# Altium PCB PCB_CONTROL.PcbDoc (part 13 of 15)
Units mil, origin at the board's own origin, x right, y up, seen from the top; angles counter-clockwise.
Board outline 7360.03 x 4773.15 mil, 2 copper layers (Top Layer, Bottom Layer); 73 components, 135 nets, 396 pads, 106 vias.
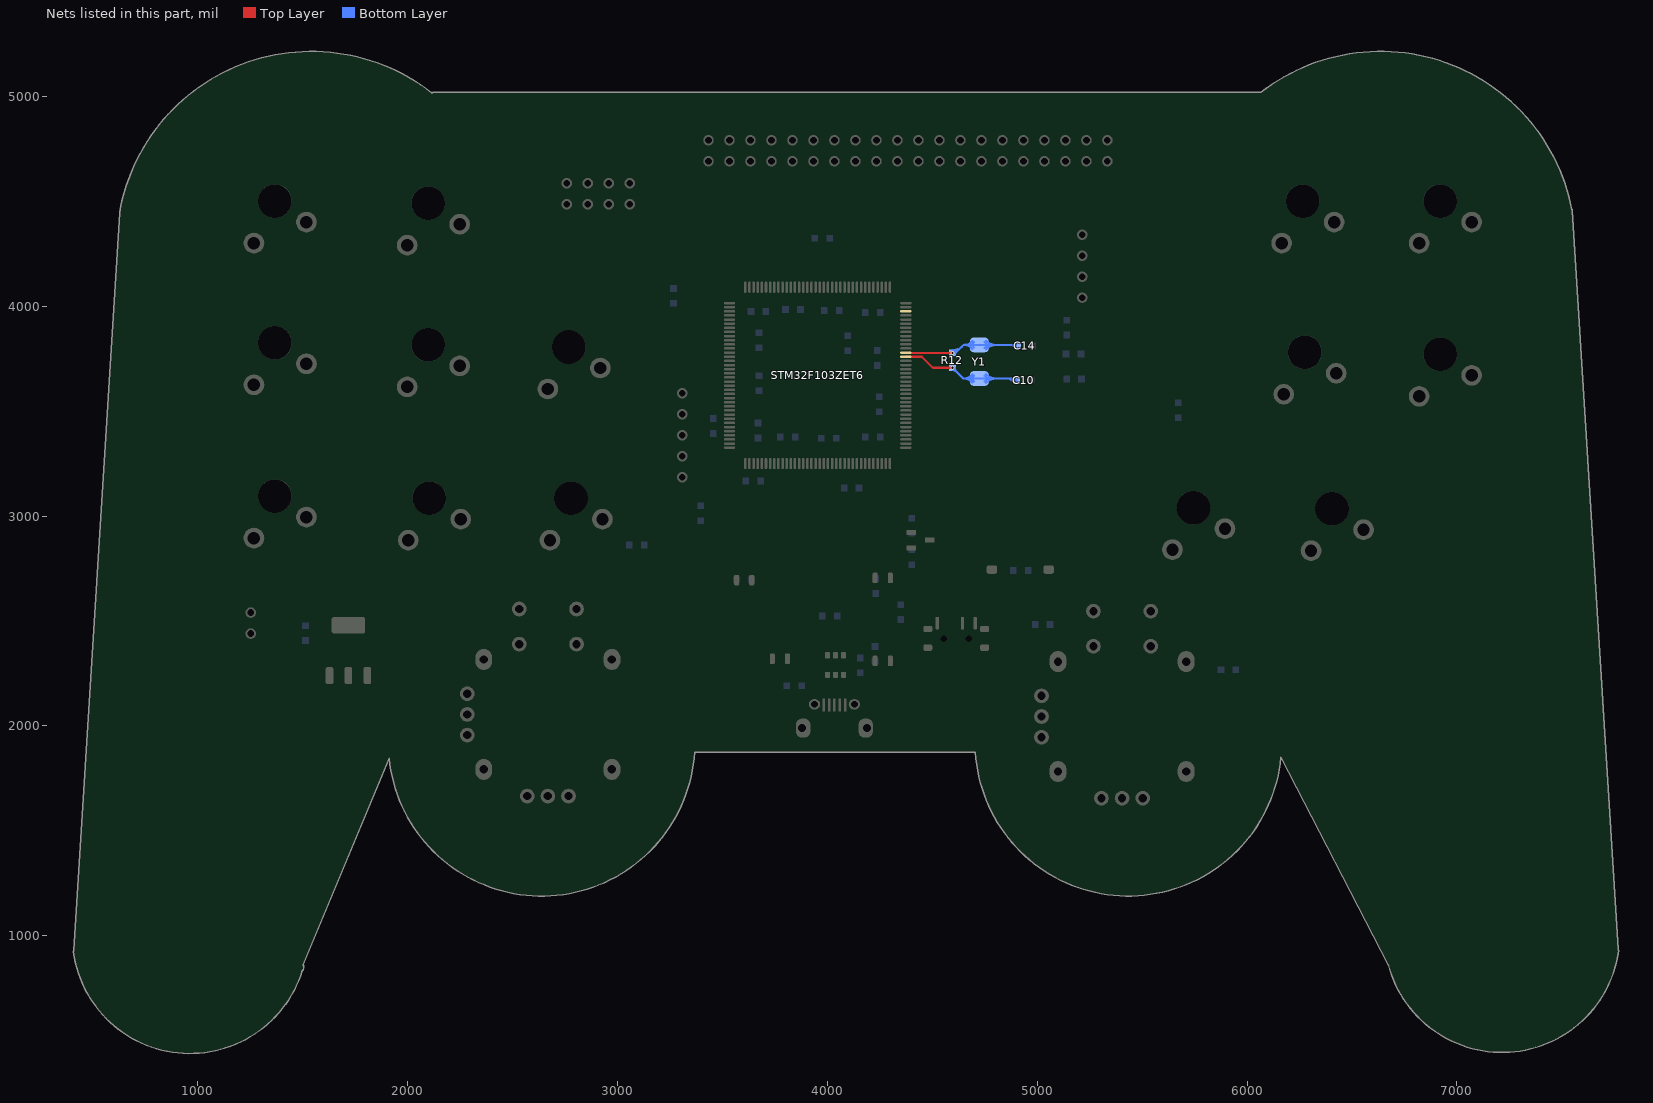
[diagram p13: the nets of this part, all layers, seen from the top]

## Via types
v1: diameter 20, hole 10, Top Layer to Bottom Layer, 104 vias
v2: diameter 30, hole 20, Top Layer to Bottom Layer, 2 vias

## Nets (pads, with @x,y where several pads share a name; then routed paths per layer and width w, separated by ;. In a path a pad name is that pad's centre, name@x,y a point inside that pad or via, vN(x,y) a via of type N, cw(c..) or ccw(c..) an arc to the next point about the centre after c; other vN are vias at no path point) (continued)
OSC_IN: C10.2 R12.2 STM32F103ZET6.23 Y1.2 | length 6551.4
  Top Layer w10: STM32F103ZET6.23@4375,3758.58 4451.42,3758.58 4504,3706 v1(4597,3706) ; STM32F103ZET6.23@4396,3758.58 4432,3758.58 ; STM32F103ZET6.23@4396,3758.58 4432,3758.58 ; STM32F103ZET6.23@4396,3758.58 4432,3758.58 ; 4557,3706 v1(4597,3706) ; 4557,3706 v1(4597,3706) ; 4557,3706 v1(4597,3706) ; 4584.93,3706 cw(c4584.93,3693.93) v1@4593.46,3702.46 ; 4584.93,3706 ccw(c4584.93,3718.07) v1@4593.46,3709.54 ; 4584.93,3706 cw(c4584.93,3693.93) v1@4593.46,3702.46 ; 4584.93,3706 ccw(c4584.93,3718.07) v1@4593.46,3709.54 ; 4584.93,3706 cw(c4584.93,3693.93) v1@4593.46,3702.46 ; 4584.93,3706 ccw(c4584.93,3718.07) v1@4593.46,3709.54 ; 4584.93,3706 cw(c4584.93,3693.93) v1@4593.46,3702.46 ; 4584.93,3706 ccw(c4584.93,3718.07) v1@4593.46,3709.54 ; 4584.93,3706 ccw(c4584.93,3718.07) v1@4593.46,3709.54 ; 4584.93,3706 cw(c4584.93,3693.93) v1@4593.46,3702.46 ; 4584.93,3706 ccw(c4584.93,3718.07) v1@4593.46,3709.54 ; 4584.93,3706 cw(c4584.93,3693.93) v1@4593.46,3702.46 ; 4584.93,3706 ccw(c4584.93,3718.07) v1@4593.46,3709.54 ; 4584.93,3706 cw(c4584.93,3693.93) v1@4593.46,3702.46 ; 4584.93,3706 ccw(c4584.93,3718.07) v1@4593.46,3709.54 ; 4584.93,3706 cw(c4584.93,3693.93) v1@4593.46,3702.46 ; 4584.93,3706 ccw(c4584.93,3718.07) v1@4593.46,3709.54 ; 4584.93,3706 cw(c4584.93,3693.93) v1@4593.46,3702.46 ; 4584.93,3706 ccw(c4584.93,3718.07) v1@4593.46,3709.54 ; 4584.93,3706 cw(c4584.93,3693.93) v1@4593.46,3702.46 ; 4584.93,3706 ccw(c4584.93,3718.07) v1@4593.46,3709.54 ; 4584.93,3706 cw(c4584.93,3693.93) v1@4593.46,3702.46 ; 4584.93,3706 ccw(c4584.93,3718.07) v1@4593.46,3709.54 ; 4584.93,3706 cw(c4584.93,3693.93) v1@4593.46,3702.46 ; 4584.93,3706 ccw(c4584.93,3718.07) v1@4593.46,3709.54 ; 4584.93,3706 cw(c4584.93,3693.93) v1@4593.46,3702.46 ; 4584.93,3706 ccw(c4584.93,3718.07) v1@4593.46,3709.54 ; 4584.93,3706 cw(c4584.93,3693.93) v1@4593.46,3702.46 ; 4584.93,3706 ccw(c4584.93,3718.07) v1@4593.46,3709.54 ; 4584.93,3706 cw(c4584.93,3693.93) v1@4593.46,3702.46 ; 4584.93,3706 ccw(c4584.93,3718.07) v1@4593.46,3709.54 ; 4584.93,3706 cw(c4584.93,3693.93) v1@4593.46,3702.46 ; 4584.93,3706 ccw(c4584.93,3718.07) v1@4593.46,3709.54 ; 4584.93,3706 cw(c4584.93,3693.93) v1@4593.46,3702.46 ; 4584.93,3706 ccw(c4584.93,3718.07) v1@4593.46,3709.54 ; 4584.93,3706 cw(c4584.93,3693.93) v1@4593.46,3702.46 ; 4584.93,3706 ccw(c4584.93,3718.07) v1@4593.46,3709.54 ; 4584.93,3706 cw(c4584.93,3693.93) v1@4593.46,3702.46 ; 4584.93,3706 ccw(c4584.93,3718.07) v1@4593.46,3709.54 ; 4584.93,3706 cw(c4584.93,3693.93) v1@4593.46,3702.46 ; 4584.93,3706 ccw(c4584.93,3718.07) v1@4593.46,3709.54 ; 4584.93,3706 cw(c4584.93,3693.93) v1@4593.46,3702.46 ; 4584.93,3706 ccw(c4584.93,3718.07) v1@4593.46,3709.54 ; 4584.93,3706 cw(c4584.93,3693.93) v1@4593.46,3702.46 ; 4584.93,3706 ccw(c4584.93,3718.07) v1@4593.46,3709.54 ; 4584.93,3706 cw(c4584.93,3693.93) v1@4593.46,3702.46 ; 4584.93,3706 ccw(c4584.93,3718.07) v1@4593.46,3709.54 ; 4584.93,3706 cw(c4584.93,3693.93) v1@4593.46,3702.46 ; 4584.93,3706 ccw(c4584.93,3718.07) v1@4593.46,3709.54 ; 4584.93,3706 cw(c4584.93,3693.93) v1@4593.46,3702.46 ; 4584.93,3706 ccw(c4584.93,3718.07) v1@4593.46,3709.54 ; 4584.93,3706 cw(c4584.93,3693.93) v1@4593.46,3702.46 ; 4584.93,3706 ccw(c4584.93,3718.07) v1@4593.46,3709.54 ; 4584.93,3706 cw(c4584.93,3693.93) v1@4593.46,3702.46 ; 4584.93,3706 ccw(c4584.93,3718.07) v1@4593.46,3709.54 ; 4584.93,3706 cw(c4584.93,3693.93) v1@4593.46,3702.46 ; 4584.93,3706 ccw(c4584.93,3718.07) v1@4593.46,3709.54 ; 4584.93,3706 cw(c4584.93,3693.93) v1@4593.46,3702.46 ; 4584.93,3706 ccw(c4584.93,3718.07) v1@4593.46,3709.54 ; 4584.93,3706 cw(c4584.93,3693.93) v1@4593.46,3702.46 ; 4584.93,3706 ccw(c4584.93,3718.07) v1@4593.46,3709.54 ; 4584.93,3706 cw(c4584.93,3693.93) v1@4593.46,3702.46 ; 4584.93,3706 ccw(c4584.93,3718.07) v1@4593.46,3709.54 ; 4584.93,3706 cw(c4584.93,3693.93) v1@4593.46,3702.46 ; 4584.93,3706 ccw(c4584.93,3718.07) v1@4593.46,3709.54 ; 4584.93,3706 cw(c4584.93,3693.93) v1@4593.46,3702.46 ; 4584.93,3706 ccw(c4584.93,3718.07) v1@4593.46,3709.54 ; 4584.93,3706 cw(c4584.93,3693.93) v1@4593.46,3702.46 ; 4584.93,3706 ccw(c4584.93,3718.07) v1@4593.46,3709.54 ; 4584.93,3706 cw(c4584.93,3693.93) v1@4593.46,3702.46 ; 4584.93,3706 ccw(c4584.93,3718.07) v1@4593.46,3709.54 ; 4584.93,3706 cw(c4584.93,3693.93) v1@4593.46,3702.46
  Bottom Layer w10: v1(4597,3706) 4648,3655 ; C10.2@4893,3655 Y1.2@4725,3655 4648,3655 ; R12.2@4597,3695 cw(c4597,3668.44) 4615.78,3687.22 ; R12.2@4597,3695 cw(c4597,3668.44) 4615.78,3687.22 ; R12.2@4597,3695 cw(c4597,3668.44) 4615.78,3687.22 ; R12.2@4597,3695 cw(c4597,3668.44) 4615.78,3687.22 ; R12.2@4597,3695 cw(c4597,3668.44) 4615.78,3687.22 ; R12.2@4597,3695 cw(c4597,3668.44) 4615.78,3687.22 ; R12.2@4597,3695 cw(c4597,3668.44) 4615.78,3687.22 ; R12.2@4597,3695 cw(c4597,3668.44) 4615.78,3687.22 ; R12.2@4597,3701 cw(c4597,3688.93) R12.2@4605.54,3697.46 ; R12.2@4597,3701 cw(c4597,3688.93) R12.2@4605.54,3697.46 ; R12.2@4597,3701 cw(c4597,3688.93) R12.2@4605.54,3697.46 ; R12.2@4597,3701 cw(c4597,3688.93) R12.2@4605.54,3697.46 ; R12.2@4597,3701 cw(c4597,3688.93) R12.2@4605.54,3697.46 ; R12.2@4597,3701 cw(c4597,3688.93) R12.2@4605.54,3697.46 ; R12.2@4597,3701 cw(c4597,3688.93) R12.2@4605.54,3697.46 ; R12.2@4597,3701 cw(c4597,3688.93) R12.2@4605.54,3697.46 ; R12.2@4597,3701 cw(c4597,3688.93) R12.2@4605.54,3697.46 ; R12.2@4597,3701 cw(c4597,3688.93) R12.2@4605.54,3697.46 ; R12.2@4602,3706 ccw(c4614.07,3706) R12.2@4605.54,3697.46 ; R12.2@4602,3706 ccw(c4614.07,3706) R12.2@4605.54,3697.46 ; R12.2@4602,3706 ccw(c4614.07,3706) R12.2@4605.54,3697.46 ; R12.2@4602,3706 ccw(c4614.07,3706) R12.2@4605.54,3697.46 ; R12.2@4602,3706 ccw(c4614.07,3706) R12.2@4605.54,3697.46 ; R12.2@4602,3706 ccw(c4614.07,3706) R12.2@4605.54,3697.46 ; R12.2@4602,3706 ccw(c4614.07,3706) R12.2@4605.54,3697.46 ; R12.2@4602,3706 ccw(c4614.07,3706) R12.2@4605.54,3697.46 ; R12.2@4602,3706 ccw(c4614.07,3706) R12.2@4605.54,3697.46 ; R12.2@4602,3706 ccw(c4614.07,3706) R12.2@4605.54,3697.46 ; R12.2@4608,3706 ccw(c4634.56,3706) 4615.78,3687.22 ; R12.2@4608,3706 ccw(c4634.56,3706) 4615.78,3687.22 ; R12.2@4608,3706 ccw(c4634.56,3706) 4615.78,3687.22 ; R12.2@4608,3706 ccw(c4634.56,3706) 4615.78,3687.22 ; R12.2@4608,3706 ccw(c4634.56,3706) 4615.78,3687.22 ; R12.2@4608,3706 ccw(c4634.56,3706) 4615.78,3687.22 ; R12.2@4608,3706 ccw(c4634.56,3706) 4615.78,3687.22 ; R12.2@4608,3706 ccw(c4634.56,3706) 4615.78,3687.22 ; 4648,3655 cw(c4648,3595.19) Y1.2@4692.62,3635.02 ; 4648,3655 ccw(c4648,3714.81) Y1.2@4692.62,3674.98 ; 4648,3655 ccw(c4648,3714.81) Y1.2@4692.62,3674.98 ; 4648,3655 cw(c4648,3595.19) Y1.2@4692.62,3635.02 ; 4648,3655 ccw(c4648,3714.81) Y1.2@4692.62,3674.98 ; 4648,3655 cw(c4648,3595.19) Y1.2@4692.62,3635.02 ; 4648,3655 ccw(c4648,3714.81) Y1.2@4692.62,3674.98 ; 4648,3655 cw(c4648,3595.19) Y1.2@4692.62,3635.02 ; 4648,3655 ccw(c4648,3714.81) Y1.2@4692.62,3674.98 ; 4648,3655 cw(c4648,3595.19) Y1.2@4692.62,3635.02 ; 4648,3655 ccw(c4648,3714.81) Y1.2@4692.62,3674.98 ; 4648,3655 cw(c4648,3595.19) Y1.2@4692.62,3635.02 ; 4648,3655 ccw(c4648,3714.81) Y1.2@4692.62,3674.98 ; 4648,3655 cw(c4648,3595.19) Y1.2@4692.62,3635.02 ; 4648,3655 ccw(c4648,3714.81) Y1.2@4692.62,3674.98 ; 4648,3655 cw(c4648,3595.19) Y1.2@4692.62,3635.02 ; 4670.34,3655 cw(c4670.34,3615.13) Y1.2@4700.08,3641.68 ; 4670.34,3655 ccw(c4670.34,3694.87) Y1.2@4700.08,3668.32 ; 4670.34,3655 ccw(c4670.34,3694.87) Y1.2@4700.08,3668.32 ; 4670.34,3655 cw(c4670.34,3615.13) Y1.2@4700.08,3641.68 ; 4670.34,3655 ccw(c4670.34,3694.87) Y1.2@4700.08,3668.32 ; 4670.34,3655 cw(c4670.34,3615.13) Y1.2@4700.08,3641.68 ; 4670.34,3655 ccw(c4670.34,3694.87) Y1.2@4700.08,3668.32 ; 4670.34,3655 cw(c4670.34,3615.13) Y1.2@4700.08,3641.68 ; 4670.34,3655 ccw(c4670.34,3694.87) Y1.2@4700.08,3668.32 ; 4670.34,3655 cw(c4670.34,3615.13) Y1.2@4700.08,3641.68 ; 4670.34,3655 ccw(c4670.34,3694.87) Y1.2@4700.08,3668.32 ; 4670.34,3655 cw(c4670.34,3615.13) Y1.2@4700.08,3641.68 ; 4670.34,3655 ccw(c4670.34,3694.87) Y1.2@4700.08,3668.32 ; 4670.34,3655 cw(c4670.34,3615.13) Y1.2@4700.08,3641.68 ; 4670.34,3655 ccw(c4670.34,3694.87) Y1.2@4700.08,3668.32 ; 4670.34,3655 cw(c4670.34,3615.13) Y1.2@4700.08,3641.68 ; Y1.2@4749.14,3640.86 cw(c4783.28,3606.72) 4783.28,3655 ; Y1.2@4749.14,3640.86 cw(c4783.28,3606.72) 4783.28,3655 ; Y1.2@4749.14,3640.86 cw(c4783.28,3606.72) 4783.28,3655 ; Y1.2@4749.14,3640.86 cw(c4783.28,3606.72) 4783.28,3655 ; Y1.2@4749.14,3640.86 cw(c4783.28,3606.72) 4783.28,3655 ; Y1.2@4749.14,3640.86 cw(c4783.28,3606.72) 4783.28,3655 ; Y1.2@4749.14,3640.86 cw(c4783.28,3606.72) 4783.28,3655 ; Y1.2@4749.14,3640.86 cw(c4783.28,3606.72) 4783.28,3655 ; Y1.2@4749.14,3669.14 ccw(c4783.28,3703.28) 4783.28,3655 ; Y1.2@4749.14,3669.14 ccw(c4783.28,3703.28) 4783.28,3655 ; Y1.2@4749.14,3669.14 ccw(c4783.28,3703.28) 4783.28,3655 ; Y1.2@4749.14,3669.14 ccw(c4783.28,3703.28) 4783.28,3655 ; Y1.2@4749.14,3669.14 ccw(c4783.28,3703.28) 4783.28,3655 ; Y1.2@4749.14,3669.14 ccw(c4783.28,3703.28) 4783.28,3655 ; Y1.2@4749.14,3669.14 ccw(c4783.28,3703.28) 4783.28,3655 ; Y1.2@4749.14,3669.14 ccw(c4783.28,3703.28) 4783.28,3655 ; Y1.2@4756.21,3633.79 cw(c4807.43,3582.57) 4807.43,3655 ; Y1.2@4756.21,3633.79 cw(c4807.43,3582.57) 4807.43,3655 ; Y1.2@4756.21,3633.79 cw(c4807.43,3582.57) 4807.43,3655 ; Y1.2@4756.21,3633.79 cw(c4807.43,3582.57) 4807.43,3655 ; Y1.2@4756.21,3633.79 cw(c4807.43,3582.57) 4807.43,3655 ; Y1.2@4756.21,3633.79 cw(c4807.43,3582.57) 4807.43,3655 ; Y1.2@4756.21,3633.79 cw(c4807.43,3582.57) 4807.43,3655 ; Y1.2@4756.21,3633.79 cw(c4807.43,3582.57) 4807.43,3655 ; Y1.2@4756.21,3676.21 ccw(c4807.43,3727.43) 4807.43,3655 ; Y1.2@4756.21,3676.21 ccw(c4807.43,3727.43) 4807.43,3655 ; Y1.2@4756.21,3676.21 ccw(c4807.43,3727.43) 4807.43,3655 ; Y1.2@4756.21,3676.21 ccw(c4807.43,3727.43) 4807.43,3655 ; Y1.2@4756.21,3676.21 ccw(c4807.43,3727.43) 4807.43,3655 ; Y1.2@4756.21,3676.21 ccw(c4807.43,3727.43) 4807.43,3655 ; Y1.2@4756.21,3676.21 ccw(c4807.43,3727.43) 4807.43,3655 ; Y1.2@4756.21,3676.21 ccw(c4807.43,3727.43) 4807.43,3655 ; 4853.72,3655 cw(c4853.72,3597.72) C10.2@4894.22,3638.22 ; 4853.72,3655 cw(c4853.72,3597.72) C10.2@4894.22,3638.22 ; 4853.72,3655 cw(c4853.72,3597.72) C10.2@4894.22,3638.22 ; 4853.72,3655 cw(c4853.72,3597.72) C10.2@4894.22,3638.22 ; 4853.72,3655 cw(c4853.72,3597.72) C10.2@4894.22,3638.22 ; 4853.72,3655 cw(c4853.72,3597.72) C10.2@4894.22,3638.22 ; 4853.72,3655 cw(c4853.72,3597.72) C10.2@4894.22,3638.22 ; 4853.72,3655 cw(c4853.72,3597.72) C10.2@4894.22,3638.22 ; 4873.86,3649.98 ccw(c4881.8,3663.74) C10.2@4893.73,3653.26 ; 4873.86,3649.98 ccw(c4881.8,3663.74) C10.2@4893.73,3653.26 ; 4873.86,3649.98 ccw(c4881.8,3663.74) C10.2@4893.73,3653.26 ; 4873.86,3649.98 ccw(c4881.8,3663.74) C10.2@4893.73,3653.26 ; 4873.86,3649.98 ccw(c4881.8,3663.74) C10.2@4893.73,3653.26 ; 4873.86,3649.98 ccw(c4881.8,3663.74) C10.2@4893.73,3653.26 ; 4873.86,3649.98 ccw(c4881.8,3663.74) C10.2@4893.73,3653.26 ; 4873.86,3649.98 ccw(c4881.8,3663.74) C10.2@4893.73,3653.26 ; 4873.86,3649.98 ccw(c4881.8,3663.74) C10.2@4893.73,3653.26 ; 4873.86,3649.98 ccw(c4881.8,3663.74) C10.2@4893.73,3653.26 ; 4873.86,3649.98 ccw(c4881.8,3663.74) C10.2@4893.73,3653.26 ; 4873.86,3649.98 ccw(c4881.8,3663.74) C10.2@4893.73,3653.26 ; 4873.86,3649.98 ccw(c4881.8,3663.74) C10.2@4893.73,3653.26 ; 4873.86,3649.98 ccw(c4881.8,3663.74) C10.2@4893.73,3653.26 ; 4873.86,3649.98 ccw(c4881.8,3663.74) C10.2@4893.73,3653.26 ; 4873.86,3649.98 ccw(c4881.8,3663.74) C10.2@4893.73,3653.26 ; 4873.86,3649.98 ccw(c4881.8,3663.74) C10.2@4893.73,3653.26 ; 4873.86,3649.98 ccw(c4881.8,3663.74) C10.2@4893.73,3653.26 ; 4873.86,3649.98 ccw(c4881.8,3663.74) C10.2@4893.73,3653.26 ; 4873.86,3649.98 ccw(c4881.8,3663.74) C10.2@4893.73,3653.26 ; 4873.86,3649.98 ccw(c4881.8,3663.74) C10.2@4893.73,3653.26 ; 4873.86,3649.98 ccw(c4881.8,3663.74) C10.2@4893.73,3653.26 ; 4873.86,3649.98 ccw(c4881.8,3663.74) C10.2@4893.73,3653.26 ; 4873.86,3649.98 ccw(c4881.8,3663.74) C10.2@4893.73,3653.26 ; 4873.86,3649.98 ccw(c4881.8,3663.74) C10.2@4893.73,3653.26 ; 4873.86,3649.98 ccw(c4881.8,3663.74) C10.2@4893.73,3653.26 ; 4873.86,3649.98 ccw(c4881.8,3663.74) C10.2@4893.73,3653.26 ; 4873.86,3649.98 ccw(c4881.8,3663.74) C10.2@4893.73,3653.26 ; 4877.86,3655 cw(c4877.86,3621.86) C10.2@4901.29,3645.29 ; 4877.86,3655 cw(c4877.86,3621.86) C10.2@4901.29,3645.29 ; 4877.86,3655 cw(c4877.86,3621.86) C10.2@4901.29,3645.29 ; 4877.86,3655 cw(c4877.86,3621.86) C10.2@4901.29,3645.29 ; 4877.86,3655 cw(c4877.86,3621.86) C10.2@4901.29,3645.29 ; 4877.86,3655 cw(c4877.86,3621.86) C10.2@4901.29,3645.29 ; 4877.86,3655 cw(c4877.86,3621.86) C10.2@4901.29,3645.29 ; 4877.86,3655 cw(c4877.86,3621.86) C10.2@4901.29,3645.29 ; 4884.41,3643.88 ccw(c4891.14,3655.53) C10.2@4901.25,3646.66 ; 4884.41,3643.88 ccw(c4891.14,3655.53) C10.2@4901.25,3646.66 ; 4884.41,3643.88 ccw(c4891.14,3655.53) C10.2@4901.25,3646.66 ; 4884.41,3643.88 ccw(c4891.14,3655.53) C10.2@4901.25,3646.66 ; 4884.41,3643.88 ccw(c4891.14,3655.53) C10.2@4901.25,3646.66 ; 4884.41,3643.88 ccw(c4891.14,3655.53) C10.2@4901.25,3646.66 ; 4884.41,3643.88 ccw(c4891.14,3655.53) C10.2@4901.25,3646.66 ; 4884.41,3643.88 ccw(c4891.14,3655.53) C10.2@4901.25,3646.66 ; 4884.41,3643.88 ccw(c4891.14,3655.53) C10.2@4901.25,3646.66 ; 4884.41,3643.88 ccw(c4891.14,3655.53) C10.2@4901.25,3646.66 ; 4884.41,3643.88 ccw(c4891.14,3655.53) C10.2@4901.25,3646.66 ; 4884.41,3643.88 ccw(c4891.14,3655.53) C10.2@4901.25,3646.66 ; 4884.41,3643.88 ccw(c4891.14,3655.53) C10.2@4901.25,3646.66 ; 4884.41,3643.88 ccw(c4891.14,3655.53) C10.2@4901.25,3646.66 ; 4884.41,3643.88 ccw(c4891.14,3655.53) C10.2@4901.25,3646.66 ; 4884.41,3643.88 ccw(c4891.14,3655.53) C10.2@4901.25,3646.66 ; 4884.41,3643.88 ccw(c4891.14,3655.53) C10.2@4901.25,3646.66 ; 4884.41,3643.88 ccw(c4891.14,3655.53) C10.2@4901.25,3646.66 ; 4884.41,3643.88 ccw(c4891.14,3655.53) C10.2@4901.25,3646.66 ; 4884.41,3643.88 ccw(c4891.14,3655.53) C10.2@4901.25,3646.66 ; 4884.41,3643.88 ccw(c4891.14,3655.53) C10.2@4901.25,3646.66 ; 4884.41,3643.88 ccw(c4891.14,3655.53) C10.2@4901.25,3646.66 ; 4884.41,3643.88 ccw(c4891.14,3655.53) C10.2@4901.25,3646.66 ; 4884.41,3643.88 ccw(c4891.14,3655.53) C10.2@4901.25,3646.66 ; 4884.41,3643.88 ccw(c4891.14,3655.53) C10.2@4901.25,3646.66 ; 4884.41,3643.88 ccw(c4891.14,3655.53) C10.2@4901.25,3646.66 ; 4884.41,3643.88 ccw(c4891.14,3655.53) C10.2@4901.25,3646.66 ; 4884.41,3643.88 ccw(c4891.14,3655.53) C10.2@4901.25,3646.66
OSC_OUT: C14.2 R12.1 STM32F103ZET6.24 Y1.1 | length 10818.7
  Top Layer w10: STM32F103ZET6.24@4376.27,3777 v1(4597,3777) ; STM32F103ZET6.24@4396,3778.27 4432.02,3777 ; STM32F103ZET6.24@4396,3778.27 4432.01,3777 ; STM32F103ZET6.24@4396,3778.27 4432.02,3777 ; 4557,3777 v1(4597,3777) ; 4557,3777 v1(4597,3777) ; 4557,3777 v1(4597,3777) ; 4584.93,3777 cw(c4584.93,3764.93) v1@4593.46,3773.46 ; 4584.93,3777 ccw(c4584.93,3789.07) v1@4593.46,3780.54 ; 4584.93,3777 cw(c4584.93,3764.93) v1@4593.46,3773.46 ; 4584.93,3777 ccw(c4584.93,3789.07) v1@4593.46,3780.54 ; 4584.93,3777 cw(c4584.93,3764.93) v1@4593.46,3773.46 ; 4584.93,3777 ccw(c4584.93,3789.07) v1@4593.46,3780.54 ; 4584.93,3777 cw(c4584.93,3764.93) v1@4593.46,3773.46 ; 4584.93,3777 ccw(c4584.93,3789.07) v1@4593.46,3780.54 ; 4584.93,3777 ccw(c4584.93,3789.07) v1@4593.46,3780.54 ; 4584.93,3777 cw(c4584.93,3764.93) v1@4593.46,3773.46 ; 4584.93,3777 ccw(c4584.93,3789.07) v1@4593.46,3780.54 ; 4584.93,3777 cw(c4584.93,3764.93) v1@4593.46,3773.46 ; 4584.93,3777 ccw(c4584.93,3789.07) v1@4593.46,3780.54 ; 4584.93,3777 cw(c4584.93,3764.93) v1@4593.46,3773.46 ; 4584.93,3777 ccw(c4584.93,3789.07) v1@4593.46,3780.54 ; 4584.93,3777 cw(c4584.93,3764.93) v1@4593.46,3773.46 ; 4584.93,3777 ccw(c4584.93,3789.07) v1@4593.46,3780.54 ; 4584.93,3777 cw(c4584.93,3764.93) v1@4593.46,3773.46 ; 4584.93,3777 ccw(c4584.93,3789.07) v1@4593.46,3780.54 ; 4584.93,3777 cw(c4584.93,3764.93) v1@4593.46,3773.46 ; 4584.93,3777 ccw(c4584.93,3789.07) v1@4593.46,3780.54 ; 4584.93,3777 cw(c4584.93,3764.93) v1@4593.46,3773.46 ; 4584.93,3777 ccw(c4584.93,3789.07) v1@4593.46,3780.54 ; 4584.93,3777 cw(c4584.93,3764.93) v1@4593.46,3773.46 ; 4584.93,3777 ccw(c4584.93,3789.07) v1@4593.46,3780.54 ; 4584.93,3777 cw(c4584.93,3764.93) v1@4593.46,3773.46 ; 4584.93,3777 ccw(c4584.93,3789.07) v1@4593.46,3780.54 ; 4584.93,3777 cw(c4584.93,3764.93) v1@4593.46,3773.46 ; 4584.93,3777 ccw(c4584.93,3789.07) v1@4593.46,3780.54 ; 4584.93,3777 cw(c4584.93,3764.93) v1@4593.46,3773.46 ; 4584.93,3777 ccw(c4584.93,3789.07) v1@4593.46,3780.54 ; 4584.93,3777 cw(c4584.93,3764.93) v1@4593.46,3773.46 ; 4584.93,3777 ccw(c4584.93,3789.07) v1@4593.46,3780.54 ; 4584.93,3777 cw(c4584.93,3764.93) v1@4593.46,3773.46 ; 4584.93,3777 ccw(c4584.93,3789.07) v1@4593.46,3780.54 ; 4584.93,3777 cw(c4584.93,3764.93) v1@4593.46,3773.46 ; 4584.93,3777 ccw(c4584.93,3789.07) v1@4593.46,3780.54 ; 4584.93,3777 cw(c4584.93,3764.93) v1@4593.46,3773.46 ; 4584.93,3777 ccw(c4584.93,3789.07) v1@4593.46,3780.54 ; 4584.93,3777 cw(c4584.93,3764.93) v1@4593.46,3773.46 ; 4584.93,3777 ccw(c4584.93,3789.07) v1@4593.46,3780.54 ; 4584.93,3777 cw(c4584.93,3764.93) v1@4593.46,3773.46 ; 4584.93,3777 ccw(c4584.93,3789.07) v1@4593.46,3780.54 ; 4584.93,3777 cw(c4584.93,3764.93) v1@4593.46,3773.46 ; 4584.93,3777 ccw(c4584.93,3789.07) v1@4593.46,3780.54 ; 4584.93,3777 cw(c4584.93,3764.93) v1@4593.46,3773.46 ; 4584.93,3777 ccw(c4584.93,3789.07) v1@4593.46,3780.54 ; 4584.93,3777 cw(c4584.93,3764.93) v1@4593.46,3773.46 ; 4584.93,3777 ccw(c4584.93,3789.07) v1@4593.46,3780.54 ; 4584.93,3777 cw(c4584.93,3764.93) v1@4593.46,3773.46 ; 4584.93,3777 ccw(c4584.93,3789.07) v1@4593.46,3780.54 ; 4584.93,3777 cw(c4584.93,3764.93) v1@4593.46,3773.46 ; 4584.93,3777 ccw(c4584.93,3789.07) v1@4593.46,3780.54 ; 4584.93,3777 cw(c4584.93,3764.93) v1@4593.46,3773.46 ; 4584.93,3777 ccw(c4584.93,3789.07) v1@4593.46,3780.54 ; 4584.93,3777 cw(c4584.93,3764.93) v1@4593.46,3773.46 ; 4584.93,3777 ccw(c4584.93,3789.07) v1@4593.46,3780.54 ; 4584.93,3777 cw(c4584.93,3764.93) v1@4593.46,3773.46 ; 4584.93,3777 ccw(c4584.93,3789.07) v1@4593.46,3780.54 ; 4584.93,3777 cw(c4584.93,3764.93) v1@4593.46,3773.46 ; 4584.93,3777 ccw(c4584.93,3789.07) v1@4593.46,3780.54 ; 4584.93,3777 cw(c4584.93,3764.93) v1@4593.46,3773.46 ; 4584.93,3777 ccw(c4584.93,3789.07) v1@4593.46,3780.54 ; 4584.93,3777 cw(c4584.93,3764.93) v1@4593.46,3773.46 ; 4584.93,3777 ccw(c4584.93,3789.07) v1@4593.46,3780.54 ; 4584.93,3777 cw(c4584.93,3764.93) v1@4593.46,3773.46 ; 4584.93,3777 ccw(c4584.93,3789.07) v1@4593.46,3780.54 ; 4584.93,3777 cw(c4584.93,3764.93) v1@4593.46,3773.46 ; 4584.93,3777 ccw(c4584.93,3789.07) v1@4593.46,3780.54 ; 4584.93,3777 cw(c4584.93,3764.93) v1@4593.46,3773.46 ; 4584.93,3777 ccw(c4584.93,3789.07) v1@4593.46,3780.54 ; 4584.93,3777 cw(c4584.93,3764.93) v1@4593.46,3773.46
  Bottom Layer w10: C14.2@4903,3815 Y1.1@4725,3815 4650,3815 ; R12.1@4597,3772 ccw(c4597,3796.14) 4614.07,3779.07 ; R12.1@4597,3772 ccw(c4597,3796.14) 4614.07,3779.07 ; R12.1@4597,3772 ccw(c4597,3796.14) 4614.07,3779.07 ; R12.1@4597,3772 ccw(c4597,3796.14) 4614.07,3779.07 ; R12.1@4597,3772 ccw(c4597,3796.14) 4614.07,3779.07 ; R12.1@4597,3772 ccw(c4597,3796.14) 4614.07,3779.07 ; R12.1@4597,3772 ccw(c4597,3796.14) 4614.07,3779.07 ; R12.1@4597,3772 ccw(c4597,3796.14) 4614.07,3779.07 ; v1(4597,3777) R12.1@4612,3777 ; v1(4597,3777) R12.1@4612,3777 ; v1(4597,3777) R12.1@4612,3777 ; R12.1@4597,3778 ccw(c4597,3816.63) 4624.31,3789.31 ; R12.1@4597,3778 ccw(c4597,3816.63) 4624.31,3789.31 ; R12.1@4597,3778 ccw(c4597,3816.63) 4624.31,3789.31 ; R12.1@4597,3778 ccw(c4597,3816.63) 4624.31,3789.31 ; R12.1@4597,3778 ccw(c4597,3816.63) 4624.31,3789.31 ; R12.1@4597,3778 ccw(c4597,3816.63) 4624.31,3789.31 ; R12.1@4597,3778 ccw(c4597,3816.63) 4624.31,3789.31 ; R12.1@4597,3778 ccw(c4597,3816.63) 4624.31,3789.31 ; R12.1@4597,3782 ccw(c4597,3830.28) 4631.14,3796.14 ; R12.1@4597,3782 ccw(c4597,3797.37) R12.1@4607.87,3786.5 ; R12.1@4597,3782 ccw(c4597,3797.37) R12.1@4607.87,3786.5 ; R12.1@4597,3782 ccw(c4597,3797.37) R12.1@4607.87,3786.5 ; R12.1@4597,3782 ccw(c4597,3797.37) R12.1@4607.87,3786.5 ; R12.1@4597,3782 ccw(c4597,3797.37) R12.1@4607.87,3786.5 ; R12.1@4597,3782 ccw(c4597,3797.37) R12.1@4607.87,3786.5 ; R12.1@4597,3782 ccw(c4597,3797.37) R12.1@4607.87,3786.5 ; R12.1@4597,3782 ccw(c4597,3797.37) R12.1@4607.87,3786.5 ; R12.1@4597,3782 ccw(c4597,3797.37) R12.1@4607.87,3786.5 ; R12.1@4597,3782 ccw(c4597,3797.37) R12.1@4607.87,3786.5 ; R12.1@4597,3782 ccw(c4597,3797.37) R12.1@4607.87,3786.5 ; R12.1@4597,3782 ccw(c4597,3797.37) R12.1@4607.87,3786.5 ; R12.1@4597,3782 ccw(c4597,3797.37) R12.1@4607.87,3786.5 ; R12.1@4597,3782 ccw(c4597,3797.37) R12.1@4607.87,3786.5 ; R12.1@4597,3782 ccw(c4597,3797.37) R12.1@4607.87,3786.5 ; R12.1@4597,3782 ccw(c4597,3797.37) R12.1@4607.87,3786.5 ; R12.1@4597,3782 ccw(c4597,3797.37) R12.1@4607.87,3786.5 ; R12.1@4597,3782 ccw(c4597,3797.37) R12.1@4607.87,3786.5 ; R12.1@4597,3782 ccw(c4597,3797.37) R12.1@4607.87,3786.5 ; R12.1@4597,3782 ccw(c4597,3797.37) R12.1@4607.87,3786.5 ; R12.1@4597,3782 ccw(c4597,3797.37) R12.1@4607.87,3786.5 ; R12.1@4597,3782 ccw(c4597,3797.37) R12.1@4607.87,3786.5 ; R12.1@4597,3782 ccw(c4597,3797.37) R12.1@4607.87,3786.5 ; R12.1@4597,3782 ccw(c4597,3797.37) R12.1@4607.87,3786.5 ; R12.1@4597,3782 ccw(c4597,3797.37) R12.1@4607.87,3786.5 ; R12.1@4597,3782 ccw(c4597,3797.37) R12.1@4607.87,3786.5 ; R12.1@4597,3782 ccw(c4597,3797.37) R12.1@4607.87,3786.5 ; R12.1@4597,3782 ccw(c4597,3797.37) R12.1@4607.87,3786.5 ; R12.1@4597,3782 ccw(c4597,3830.28) 4631.14,3796.14 ; R12.1@4597,3782 ccw(c4597,3797.37) R12.1@4607.87,3786.5 ; R12.1@4597,3782 ccw(c4597,3830.28) 4631.14,3796.14 ; R12.1@4597,3782 ccw(c4597,3797.37) R12.1@4607.87,3786.5 ; R12.1@4597,3782 ccw(c4597,3797.37) R12.1@4607.87,3786.5 ; R12.1@4597,3782 ccw(c4597,3797.37) R12.1@4607.87,3786.5 ; R12.1@4597,3782 ccw(c4597,3830.28) 4631.14,3796.14 ; R12.1@4597,3782 ccw(c4597,3797.37) R12.1@4607.87,3786.5 ; R12.1@4597,3782 ccw(c4597,3797.37) R12.1@4607.87,3786.5 ; R12.1@4597,3782 ccw(c4597,3797.37) R12.1@4607.87,3786.5 ; R12.1@4597,3782 ccw(c4597,3797.37) R12.1@4607.87,3786.5 ; R12.1@4597,3782 ccw(c4597,3797.37) R12.1@4607.87,3786.5 ; R12.1@4597,3782 ccw(c4597,3797.37) R12.1@4607.87,3786.5 ; R12.1@4597,3782 ccw(c4597,3830.28) 4631.14,3796.14 ; R12.1@4597,3782 ccw(c4597,3797.37) R12.1@4607.87,3786.5 ; R12.1@4597,3782 ccw(c4597,3797.37) R12.1@4607.87,3786.5 ; R12.1@4597,3782 ccw(c4597,3797.37) R12.1@4607.87,3786.5 ; R12.1@4597,3782 ccw(c4597,3797.37) R12.1@4607.87,3786.5 ; R12.1@4597,3782 ccw(c4597,3797.37) R12.1@4607.87,3786.5 ; R12.1@4597,3782 ccw(c4597,3797.37) R12.1@4607.87,3786.5 ; R12.1@4597,3782 ccw(c4597,3797.37) R12.1@4607.87,3786.5 ; R12.1@4597,3782 ccw(c4597,3797.37) R12.1@4607.87,3786.5 ; R12.1@4597,3782 ccw(c4597,3797.37) R12.1@4607.87,3786.5 ; R12.1@4597,3782 ccw(c4597,3797.37) R12.1@4607.87,3786.5 ; R12.1@4597,3782 ccw(c4597,3830.28) 4631.14,3796.14 ; R12.1@4597,3782 ccw(c4597,3797.37) R12.1@4607.87,3786.5 ; R12.1@4597,3782 ccw(c4597,3797.37) R12.1@4607.87,3786.5 ; R12.1@4597,3782 ccw(c4597,3797.37) R12.1@4607.87,3786.5 ; R12.1@4597,3782 ccw(c4597,3797.37) R12.1@4607.87,3786.5 ; R12.1@4597,3782 ccw(c4597,3797.37) R12.1@4607.87,3786.5 ; R12.1@4597,3782 ccw(c4597,3797.37) R12.1@4607.87,3786.5 ; R12.1@4597,3782 ccw(c4597,3797.37) R12.1@4607.87,3786.5 ; R12.1@4597,3782 ccw(c4597,3797.37) R12.1@4607.87,3786.5 ; R12.1@4597,3782 ccw(c4597,3797.37) R12.1@4607.87,3786.5 ; R12.1@4597,3782 ccw(c4597,3797.37) R12.1@4607.87,3786.5 ; R12.1@4597,3782 ccw(c4597,3797.37) R12.1@4607.87,3786.5 ; R12.1@4597,3782 ccw(c4597,3797.37) R12.1@4607.87,3786.5 ; R12.1@4597,3782 ccw(c4597,3797.37) R12.1@4607.87,3786.5 ; R12.1@4597,3782 ccw(c4597,3797.37) R12.1@4607.87,3786.5 ; R12.1@4597,3782 ccw(c4597,3797.37) R12.1@4607.87,3786.5 ; R12.1@4597,3782 ccw(c4597,3830.28) 4631.14,3796.14 ; R12.1@4597,3782 ccw(c4597,3797.37) R12.1@4607.87,3786.5 ; R12.1@4597,3782 ccw(c4597,3797.37) R12.1@4607.87,3786.5 ; R12.1@4597,3782 ccw(c4597,3797.37) R12.1@4607.87,3786.5 ; R12.1@4597,3782 ccw(c4597,3797.37) R12.1@4607.87,3786.5 ; R12.1@4597,3782 ccw(c4597,3797.37) R12.1@4607.87,3786.5 ; R12.1@4597,3782 ccw(c4597,3797.37) R12.1@4607.87,3786.5 ; R12.1@4597,3782 ccw(c4597,3797.37) R12.1@4607.87,3786.5 ; R12.1@4597,3782 ccw(c4597,3797.37) R12.1@4607.87,3786.5 ; R12.1@4597,3782 ccw(c4597,3797.37) R12.1@4607.87,3786.5 ; R12.1@4597,3782 ccw(c4597,3797.37) R12.1@4607.87,3786.5 ; R12.1@4597,3782 ccw(c4597,3797.37) R12.1@4607.87,3786.5 ; R12.1@4597,3782 ccw(c4597,3797.37) R12.1@4607.87,3786.5 ; R12.1@4597,3782 ccw(c4597,3797.37) R12.1@4607.87,3786.5 ; R12.1@4597,3782 ccw(c4597,3797.37) R12.1@4607.87,3786.5 ; R12.1@4597,3782 ccw(c4597,3797.37) R12.1@4607.87,3786.5 ; R12.1@4597,3782 ccw(c4597,3797.37) R12.1@4607.87,3786.5 ; R12.1@4597,3782 ccw(c4597,3797.37) R12.1@4607.87,3786.5 ; R12.1@4597,3782 ccw(c4597,3797.37) R12.1@4607.87,3786.5 ; R12.1@4597,3782 ccw(c4597,3797.37) R12.1@4607.87,3786.5 ; R12.1@4597,3782 ccw(c4597,3797.37) R12.1@4607.87,3786.5 ; R12.1@4597,3782 ccw(c4597,3797.37) R12.1@4607.87,3786.5 ; R12.1@4597,3782 ccw(c4597,3830.28) 4631.14,3796.14 ; R12.1@4597,3788 ccw(c4597,3850.77) 4641.38,3806.38 ; R12.1@4597,3788 ccw(c4597,3850.77) 4641.38,3806.38 ; R12.1@4597,3788 ccw(c4597,3850.77) 4641.38,3806.38 ; R12.1@4597,3788 ccw(c4597,3850.77) 4641.38,3806.38 ; R12.1@4597,3788 ccw(c4597,3850.77) 4641.38,3806.38 ; R12.1@4597,3788 ccw(c4597,3850.77) 4641.38,3806.38 ; R12.1@4597,3788 ccw(c4597,3850.77) 4641.38,3806.38 ; R12.1@4597,3788 ccw(c4597,3850.77) 4641.38,3806.38 ; R12.1@4597.87,3776.5 cw(c4631.37,3757.15) 4621.36,3794.53 ; R12.1@4597.87,3776.5 cw(c4631.37,3757.15) 4621.36,3794.53 ; R12.1@4597.87,3776.5 cw(c4631.37,3757.15) 4621.36,3794.53 ; R12.1@4597.87,3776.5 cw(c4631.37,3757.15) 4621.36,3794.53 ; R12.1@4597.87,3776.5 cw(c4631.37,3757.15) 4621.36,3794.53 ; R12.1@4597.87,3776.5 cw(c4631.37,3757.15) 4621.36,3794.53 ; R12.1@4597.87,3776.5 cw(c4631.37,3757.15) 4621.36,3794.53 ; R12.1@4597.87,3776.5 cw(c4631.37,3757.15) 4621.36,3794.53 ; R12.1@4597.87,3776.5 cw(c4631.37,3757.15) 4621.36,3794.53 ; R12.1@4597.87,3776.5 cw(c4631.37,3757.15) 4621.36,3794.53 ; R12.1@4597.87,3776.5 cw(c4631.37,3757.15) 4621.36,3794.53 ; R12.1@4597.87,3776.5 cw(c4631.37,3757.15) 4621.36,3794.53 ; R12.1@4597.87,3776.5 cw(c4631.37,3757.15) 4621.36,3794.53 ; R12.1@4597.87,3776.5 cw(c4631.37,3757.15) 4621.36,3794.53 ; R12.1@4597.87,3776.5 cw(c4631.37,3757.15) 4621.36,3794.53 ; R12.1@4597.87,3776.5 cw(c4631.37,3757.15) 4621.36,3794.53 ; R12.1@4597.87,3776.5 cw(c4631.37,3757.15) 4621.36,3794.53 ; R12.1@4597.87,3776.5 cw(c4631.37,3757.15) 4621.36,3794.53 ; R12.1@4597.87,3776.5 cw(c4631.37,3757.15) 4621.36,3794.53 ; R12.1@4597.87,3776.5 cw(c4631.37,3757.15) 4621.36,3794.53 ; R12.1@4597.87,3776.5 cw(c4631.37,3757.15) 4621.36,3794.53 ; R12.1@4597.87,3776.5 cw(c4631.37,3757.15) 4621.36,3794.53 ; R12.1@4597.87,3776.5 cw(c4631.37,3757.15) 4621.36,3794.53 ; R12.1@4597.87,3776.5 cw(c4631.37,3757.15) 4621.36,3794.53 ; R12.1@4597.87,3776.5 cw(c4631.37,3757.15) 4621.36,3794.53 ; R12.1@4597.87,3776.5 cw(c4631.37,3757.15) 4621.36,3794.53 ; R12.1@4597.87,3776.5 cw(c4631.37,3757.15) 4621.36,3794.53 ; R12.1@4597.87,3776.5 cw(c4631.37,3757.15) 4621.36,3794.53 ; R12.1@4598.54,3781.76 ccw(c4602.55,3794.19) R12.1@4611.78,3784.95 ; R12.1@4598.54,3781.76 ccw(c4602.55,3794.19) R12.1@4611.78,3784.95 ; R12.1@4598.54,3781.76 ccw(c4602.55,3794.19) R12.1@4611.78,3784.95 ; R12.1@4598.54,3781.76 ccw(c4602.55,3794.19) R12.1@4611.78,3784.95 ; R12.1@4598.54,3781.76 ccw(c4602.55,3794.19) R12.1@4611.78,3784.95 ; R12.1@4598.54,3781.76 ccw(c4602.55,3794.19) R12.1@4611.78,3784.95 ; R12.1@4598.54,3781.76 ccw(c4602.55,3794.19) R12.1@4611.78,3784.95 ; R12.1@4598.54,3781.76 ccw(c4602.55,3794.19) R12.1@4611.78,3784.95 ; R12.1@4598.54,3781.76 ccw(c4602.55,3794.19) R12.1@4611.78,3784.95 ; R12.1@4598.54,3781.76 ccw(c4602.55,3794.19) R12.1@4611.78,3784.95 ; R12.1@4598.54,3781.76 ccw(c4602.55,3794.19) R12.1@4611.78,3784.95 ; R12.1@4598.54,3781.76 ccw(c4602.55,3794.19) R12.1@4611.78,3784.95 ; R12.1@4598.54,3781.76 ccw(c4602.55,3794.19) R12.1@4611.78,3784.95 ; R12.1@4598.54,3781.76 ccw(c4602.55,3794.19) R12.1@4611.78,3784.95 ; R12.1@4598.54,3781.76 ccw(c4602.55,3794.19) R12.1@4611.78,3784.95 ; R12.1@4598.54,3781.76 ccw(c4602.55,3794.19) R12.1@4611.78,3784.95 ; R12.1@4598.54,3781.76 ccw(c4602.55,3794.19) R12.1@4611.78,3784.95 ; R12.1@4598.54,3781.76 ccw(c4602.55,3794.19) R12.1@4611.78,3784.95 ; R12.1@4598.54,3781.76 ccw(c4602.55,3794.19) R12.1@4611.78,3784.95 ; R12.1@4598.54,3781.76 ccw(c4602.55,3794.19) R12.1@4611.78,3784.95 ; R12.1@4598.54,3781.76 ccw(c4602.55,3794.19) R12.1@4611.78,3784.95 ; R12.1@4598.54,3781.76 ccw(c4602.55,3794.19) R12.1@4611.78,3784.95 ; R12.1@4598.54,3781.76 ccw(c4602.55,3794.19) R12.1@4611.78,3784.95 ; R12.1@4598.54,3781.76 ccw(c4602.55,3794.19) R12.1@4611.78,3784.95 ; R12.1@4598.54,3781.76 ccw(c4602.55,3794.19) R12.1@4611.78,3784.95 ; R12.1@4598.54,3781.76 ccw(c4602.55,3794.19) R12.1@4611.78,3784.95 ; R12.1@4598.54,3781.76 ccw(c4602.55,3794.19) R12.1@4611.78,3784.95 ; R12.1@4598.54,3781.76 ccw(c4602.55,3794.19) R12.1@4611.78,3784.95 ; R12.1@4598.54,3781.76 ccw(c4602.55,3794.19) R12.1@4611.78,3784.95 ; R12.1@4598.54,3781.76 ccw(c4602.55,3794.19) R12.1@4611.78,3784.95 ; R12.1@4598.54,3781.76 ccw(c4602.55,3794.19) R12.1@4611.78,3784.95 ; R12.1@4598.54,3781.76 ccw(c4602.55,3794.19) R12.1@4611.78,3784.95 ; R12.1@4598.54,3781.76 ccw(c4602.55,3794.19) R12.1@4611.78,3784.95 ; R12.1@4598.54,3781.76 ccw(c4602.55,3794.19) R12.1@4611.78,3784.95 ; R12.1@4598.54,3781.76 ccw(c4602.55,3794.19) R12.1@4611.78,3784.95 ; R12.1@4598.54,3781.76 ccw(c4602.55,3794.19) R12.1@4611.78,3784.95 ; R12.1@4598.54,3781.76 ccw(c4602.55,3794.19) R12.1@4611.78,3784.95 ; R12.1@4598.54,3781.76 ccw(c4602.55,3794.19) R12.1@4611.78,3784.95 ; R12.1@4598.54,3781.76 ccw(c4602.55,3794.19) R12.1@4611.78,3784.95 ; R12.1@4598.54,3781.76 ccw(c4602.55,3794.19) R12.1@4611.78,3784.95 ; R12.1@4598.54,3781.76 ccw(c4602.55,3794.19) R12.1@4611.78,3784.95 ; R12.1@4598.54,3781.76 ccw(c4602.55,3794.19) R12.1@4611.78,3784.95 ; R12.1@4598.54,3781.76 ccw(c4602.55,3794.19) R12.1@4611.78,3784.95 ; R12.1@4598.54,3781.76 ccw(c4602.55,3794.19) R12.1@4611.78,3784.95 ; R12.1@4598.54,3781.76 ccw(c4602.55,3794.19) R12.1@4611.78,3784.95 ; R12.1@4598.54,3781.76 ccw(c4602.55,3794.19) R12.1@4611.78,3784.95 ; R12.1@4598.54,3781.76 ccw(c4602.55,3794.19) R12.1@4611.78,3784.95 ; R12.1@4598.54,3781.76 ccw(c4602.55,3794.19) R12.1@4611.78,3784.95 ; R12.1@4598.54,3781.76 ccw(c4602.55,3794.19) R12.1@4611.78,3784.95 ; R12.1@4598.54,3781.76 ccw(c4602.55,3794.19) R12.1@4611.78,3784.95 ; R12.1@4598.54,3781.76 ccw(c4602.55,3794.19) R12.1@4611.78,3784.95 ; R12.1@4598.54,3781.76 ccw(c4602.55,3794.19) R12.1@4611.78,3784.95 ; R12.1@4598.54,3781.76 ccw(c4602.55,3794.19) R12.1@4611.78,3784.95 ; R12.1@4598.54,3781.76 ccw(c4602.55,3794.19) R12.1@4611.78,3784.95 ; R12.1@4598.54,3781.76 ccw(c4602.55,3794.19) R12.1@4611.78,3784.95 ; R12.1@4598.54,3781.76 ccw(c4602.55,3794.19) R12.1@4611.78,3784.95 ; R12.1@4600.54,3773.46 cw(c4609.07,3764.93) R12.1@4609.07,3777 ; R12.1@4600.54,3773.46 cw(c4609.07,3764.93) R12.1@4609.07,3777 ; R12.1@4600.54,3773.46 cw(c4609.07,3764.93) R12.1@4609.07,3777 ; R12.1@4600.54,3773.46 cw(c4609.07,3764.93) R12.1@4609.07,3777 ; R12.1@4600.54,3773.46 cw(c4609.07,3764.93) R12.1@4609.07,3777 ; R12.1@4600.54,3773.46 cw(c4609.07,3764.93) R12.1@4609.07,3777 ; R12.1@4600.54,3773.46 cw(c4609.07,3764.93) R12.1@4609.07,3777 ; R12.1@4600.54,3773.46 cw(c4609.07,3764.93) R12.1@4609.07,3777 ; R12.1@4600.54,3773.46 cw(c4609.07,3764.93) R12.1@4609.07,3777 ; R12.1@4600.54,3773.46 cw(c4609.07,3764.93) R12.1@4609.07,3777 ; R12.1@4600.54,3773.46 cw(c4609.07,3764.93) R12.1@4609.07,3777 ; R12.1@4600.54,3773.46 cw(c4609.07,3764.93) R12.1@4609.07,3777 ; R12.1@4600.54,3773.46 cw(c4609.07,3764.93) R12.1@4609.07,3777 ; R12.1@4600.54,3773.46 cw(c4609.07,3764.93) R12.1@4609.07,3777 ; R12.1@4600.54,3773.46 cw(c4609.07,3764.93) R12.1@4609.07,3777 ; R12.1@4600.54,3773.46 cw(c4609.07,3764.93) R12.1@4609.07,3777 ; R12.1@4600.54,3773.46 cw(c4609.07,3764.93) R12.1@4609.07,3777 ; R12.1@4600.54,3773.46 cw(c4609.07,3764.93) R12.1@4609.07,3777 ; R12.1@4600.54,3773.46 cw(c4609.07,3764.93) R12.1@4609.07,3777 ; R12.1@4600.54,3773.46 cw(c4609.07,3764.93) R12.1@4609.07,3777 ; R12.1@4600.54,3773.46 cw(c4609.07,3764.93) R12.1@4609.07,3777 ; R12.1@4600.54,3773.46 cw(c4609.07,3764.93) R12.1@4609.07,3777 ; R12.1@4600.54,3773.46 cw(c4609.07,3764.93) R12.1@4609.07,3777 ; R12.1@4600.54,3773.46 cw(c4609.07,3764.93) R12.1@4609.07,3777 ; R12.1@4600.54,3773.46 cw(c4609.07,3764.93) R12.1@4609.07,3777 ; R12.1@4600.54,3773.46 cw(c4609.07,3764.93) R12.1@4609.07,3777 ; R12.1@4600.54,3773.46 cw(c4609.07,3764.93) R12.1@4609.07,3777 ; R12.1@4600.54,3773.46 cw(c4609.07,3764.93) R12.1@4609.07,3777 ; R12.1@4600.54,3780.54 ccw(c4609.07,3789.07) R12.1@4609.07,3777 ; R12.1@4600.54,3780.54 ccw(c4609.07,3789.07) R12.1@4609.07,3777 ; R12.1@4600.54,3780.54 ccw(c4609.07,3789.07) R12.1@4609.07,3777 ; R12.1@4600.54,3780.54 ccw(c4609.07,3789.07) R12.1@4609.07,3777 ; R12.1@4600.54,3780.54 ccw(c4609.07,3789.07) R12.1@4609.07,3777 ; R12.1@4600.54,3780.54 ccw(c4609.07,3789.07) R12.1@4609.07,3777 ; R12.1@4600.54,3780.54 ccw(c4609.07,3789.07) R12.1@4609.07,3777 ; R12.1@4600.54,3780.54 ccw(c4609.07,3789.07) R12.1@4609.07,3777 ; R12.1@4600.54,3780.54 ccw(c4609.07,3789.07) R12.1@4609.07,3777 ; R12.1@4600.54,3780.54 ccw(c4609.07,3789.07) R12.1@4609.07,3777 ; R12.1@4600.54,3780.54 ccw(c4609.07,3789.07) R12.1@4609.07,3777 ; R12.1@4600.54,3780.54 ccw(c4609.07,3789.07) R12.1@4609.07,3777 ; R12.1@4600.54,3780.54 ccw(c4609.07,3789.07) R12.1@4609.07,3777 ; R12.1@4600.54,3780.54 ccw(c4609.07,3789.07) R12.1@4609.07,3777 ; R12.1@4600.54,3780.54 ccw(c4609.07,3789.07) R12.1@4609.07,3777 ; R12.1@4600.54,3780.54 ccw(c4609.07,3789.07) R12.1@4609.07,3777 ; R12.1@4600.54,3780.54 ccw(c4609.07,3789.07) R12.1@4609.07,3777 ; R12.1@4600.54,3780.54 ccw(c4609.07,3789.07) R12.1@4609.07,3777 ; R12.1@4600.54,3780.54 ccw(c4609.07,3789.07) R12.1@4609.07,3777 ; R12.1@4600.54,3780.54 ccw(c4609.07,3789.07) R12.1@4609.07,3777 ; R12.1@4600.54,3780.54 ccw(c4609.07,3789.07) R12.1@4609.07,3777 ; R12.1@4600.54,3780.54 ccw(c4609.07,3789.07) R12.1@4609.07,3777 ; R12.1@4600.54,3780.54 ccw(c4609.07,3789.07) R12.1@4609.07,3777 ; R12.1@4600.54,3780.54 ccw(c4609.07,3789.07) R12.1@4609.07,3777 ; R12.1@4600.54,3780.54 ccw(c4609.07,3789.07) R12.1@4609.07,3777 ; R12.1@4600.54,3780.54 ccw(c4609.07,3789.07) R12.1@4609.07,3777 ; R12.1@4600.54,3780.54 ccw(c4609.07,3789.07) R12.1@4609.07,3777 ; R12.1@4600.54,3780.54 ccw(c4609.07,3789.07) R12.1@4609.07,3777 ; R12.1@4601.33,3774.5 cw(c4614.64,3766.82) R12.1@4610.66,3781.66 ; R12.1@4601.33,3774.5 cw(c4614.64,3766.82) R12.1@4610.66,3781.66 ; R12.1@4601.33,3774.5 cw(c4626.06,3760.22) 4618.67,3787.81 ; R12.1@4601.33,3774.5 cw(c4614.64,3766.82) R12.1@4610.66,3781.66 ; R12.1@4601.33,3774.5 cw(c4626.06,3760.22) 4618.67,3787.81 ; R12.1@4601.33,3774.5 cw(c4614.64,3766.82) R12.1@4610.66,3781.66 ; R12.1@4601.33,3774.5 cw(c4626.06,3760.22) 4618.67,3787.81 ; R12.1@4601.33,3774.5 cw(c4614.64,3766.82) R12.1@4610.66,3781.66 ; R12.1@4601.33,3774.5 cw(c4626.06,3760.22) 4618.67,3787.81 ; R12.1@4601.33,3774.5 cw(c4614.64,3766.82) R12.1@4610.66,3781.66 ; R12.1@4601.33,3774.5 cw(c4626.06,3760.22) 4618.67,3787.81 ; R12.1@4601.33,3774.5 cw(c4614.64,3766.82) R12.1@4610.66,3781.66 ; R12.1@4601.33,3774.5 cw(c4626.06,3760.22) 4618.67,3787.81 ; R12.1@4601.33,3774.5 cw(c4614.64,3766.82) R12.1@4610.66,3781.66 ; R12.1@4601.33,3774.5 cw(c4626.06,3760.22) 4618.67,3787.81 ; R12.1@4601.33,3774.5 cw(c4614.64,3766.82) R12.1@4610.66,3781.66 ; R12.1@4601.33,3774.5 cw(c4614.64,3766.82) R12.1@4610.66,3781.66 ; R12.1@4601.33,3774.5 cw(c4626.06,3760.22) 4618.67,3787.81 ; R12.1@4601.33,3774.5 cw(c4614.64,3766.82) R12.1@4610.66,3781.66 ; R12.1@4601.33,3774.5 cw(c4614.64,3766.82) R12.1@4610.66,3781.66 ; R12.1@4601.33,3774.5 cw(c4626.06,3760.22) 4618.67,3787.81 ; R12.1@4601.33,3774.5 cw(c4614.64,3766.82) R12.1@4610.66,3781.66 ; R12.1@4601.33,3774.5 cw(c4626.06,3760.22) 4618.67,3787.81 ; R12.1@4601.33,3774.5 cw(c4614.64,3766.82) R12.1@4610.66,3781.66 ; R12.1@4601.33,3774.5 cw(c4614.64,3766.82) R12.1@4610.66,3781.66 ; R12.1@4601.33,3774.5 cw(c4626.06,3760.22) 4618.67,3787.81 ; R12.1@4601.33,3774.5 cw(c4614.64,3766.82) R12.1@4610.66,3781.66 ; R12.1@4601.33,3774.5 cw(c4626.06,3760.22) 4618.67,3787.81 ; R12.1@4601.33,3774.5 cw(c4614.64,3766.82) R12.1@4610.66,3781.66 ; R12.1@4601.33,3774.5 cw(c4626.06,3760.22) 4618.67,3787.81 ; R12.1@4601.33,3774.5 cw(c4614.64,3766.82) R12.1@4610.66,3781.66 ; R12.1@4601.33,3774.5 cw(c4614.64,3766.82) R12.1@4610.66,3781.66 ; R12.1@4601.33,3774.5 cw(c4626.06,3760.22) 4618.67,3787.81 ; R12.1@4601.33,3774.5 cw(c4614.64,3766.82) R12.1@4610.66,3781.66 ; R12.1@4601.33,3774.5 cw(c4626.06,3760.22) 4618.67,3787.81 ; R12.1@4601.33,3774.5 cw(c4614.64,3766.82) R12.1@4610.66,3781.66 ; R12.1@4601.33,3774.5 cw(c4626.06,3760.22) 4618.67,3787.81 ; R12.1@4601.33,3774.5 cw(c4614.64,3766.82) R12.1@4610.66,3781.66 ; R12.1@4601.33,3774.5 cw(c4626.06,3760.22) 4618.67,3787.81 ; R12.1@4601.33,3774.5 cw(c4614.64,3766.82) R12.1@4610.66,3781.66 ; R12.1@4601.33,3774.5 cw(c4614.64,3766.82) R12.1@4610.66,3781.66 ; R12.1@4601.33,3774.5 cw(c4626.06,3760.22) 4618.67,3787.81 ; R12.1@4601.33,3774.5 cw(c4614.64,3766.82) R12.1@4610.66,3781.66 ; R12.1@4601.33,3774.5 cw(c4626.06,3760.22) 4618.67,3787.81 ; R12.1@4601.33,3774.5 cw(c4614.64,3766.82) R12.1@4610.66,3781.66 ; R12.1@4601.33,3774.5 cw(c4626.06,3760.22) 4618.67,3787.81 ; R12.1@4601.33,3774.5 cw(c4614.64,3766.82) R12.1@4610.66,3781.66 ; R12.1@4601.33,3774.5 cw(c4626.06,3760.22) 4618.67,3787.81 ; R12.1@4601.33,3774.5 cw(c4614.64,3766.82) R12.1@4610.66,3781.66 ; R12.1@4601.33,3774.5 cw(c4626.06,3760.22) 4618.67,3787.81 ; R12.1@4601.33,3774.5 cw(c4614.64,3766.82) R12.1@4610.66,3781.66 ; R12.1@4601.33,3774.5 cw(c4614.64,3766.82) R12.1@4610.66,3781.66 ; R12.1@4601.33,3774.5 cw(c4626.06,3760.22) 4618.67,3787.81 ; R12.1@4601.33,3774.5 cw(c4614.64,3766.82) R12.1@4610.66,3781.66 ; R12.1@4601.33,3774.5 cw(c4626.06,3760.22) 4618.67,3787.81 ; R12.1@4601.33,3774.5 cw(c4614.64,3766.82) R12.1@4610.66,3781.66 ; R12.1@4601.33,3774.5 cw(c4626.06,3760.22) 4618.67,3787.81 ; R12.1@4601.33,3774.5 cw(c4614.64,3766.82) R12.1@4610.66,3781.66 ; R12.1@4601.33,3774.5 cw(c4626.06,3760.22) 4618.67,3787.81 ; R12.1@4601.33,3774.5 cw(c4614.64,3766.82) R12.1@4610.66,3781.66 ; R12.1@4601.33,3774.5 cw(c4626.06,3760.22) 4618.67,3787.81 ; R12.1@4601.33,3774.5 cw(c4614.64,3766.82) R12.1@4610.66,3781.66 ; R12.1@4601.33,3774.5 cw(c4626.06,3760.22) 4618.67,3787.81 ; R12.1@4601.33,3774.5 cw(c4614.64,3766.82) R12.1@4610.66,3781.66 ; R12.1@4603.18,3786.1 ccw(c4613.28,3800.97) 4617.93,3783.61 ; R12.1@4603.18,3786.1 ccw(c4613.28,3800.97) 4617.93,3783.61 ; R12.1@4603.18,3786.1 ccw(c4613.28,3800.97) 4617.93,3783.61 ; R12.1@4603.18,3786.1 ccw(c4613.28,3800.97) 4617.93,3783.61 ; R12.1@4603.18,3786.1 ccw(c4613.28,3800.97) 4617.93,3783.61 ; R12.1@4603.18,3786.1 ccw(c4613.28,3800.97) 4617.93,3783.61 ; R12.1@4603.18,3786.1 ccw(c4613.28,3800.97) 4617.93,3783.61 ; R12.1@4603.18,3786.1 ccw(c4613.28,3800.97) 4617.93,3783.61 ; R12.1@4603.18,3786.1 ccw(c4613.28,3800.97) 4617.93,3783.61 ; R12.1@4603.18,3786.1 ccw(c4613.28,3800.97) 4617.93,3783.61 ; R12.1@4603.18,3786.1 ccw(c4613.28,3800.97) 4617.93,3783.61 ; R12.1@4603.18,3786.1 ccw(c4613.28,3800.97) 4617.93,3783.61 ; R12.1@4603.18,3786.1 ccw(c4613.28,3800.97) 4617.93,3783.61 ; R12.1@4603.18,3786.1 ccw(c4613.28,3800.97) 4617.93,3783.61 ; R12.1@4603.18,3786.1 ccw(c4613.28,3800.97) 4617.93,3783.61 ; R12.1@4603.18,3786.1 ccw(c4613.28,3800.97) 4617.93,3783.61 ; R12.1@4603.18,3786.1 ccw(c4613.28,3800.97) 4617.93,3783.61 ; R12.1@4603.18,3786.1 ccw(c4613.28,3800.97) 4617.93,3783.61 ; R12.1@4603.18,3786.1 ccw(c4613.28,3800.97) 4617.93,3783.61 ; R12.1@4603.18,3786.1 ccw(c4613.28,3800.97) 4617.93,3783.61 ; R12.1@4603.18,3786.1 ccw(c4613.28,3800.97) 4617.93,3783.61 ; R12.1@4603.18,3786.1 ccw(c4613.28,3800.97) 4617.93,3783.61 ; R12.1@4603.18,3786.1 ccw(c4613.28,3800.97) 4617.93,3783.61 ; R12.1@4603.18,3786.1 ccw(c4613.28,3800.97) 4617.93,3783.61 ; R12.1@4603.18,3786.1 ccw(c4613.28,3800.97) 4617.93,3783.61 ; R12.1@4603.18,3786.1 ccw(c4613.28,3800.97) 4617.93,3783.61 ; R12.1@4603.18,3786.1 ccw(c4613.28,3800.97) 4617.93,3783.61 ; R12.1@4603.18,3786.1 ccw(c4613.28,3800.97) 4617.93,3783.61 ; R12.1@4607.48,3773.65 cw(c4621.83,3769.05) 4617.93,3783.61 ; R12.1@4607.48,3773.65 cw(c4621.83,3769.05) 4617.93,3783.61 ; R12.1@4607.48,3773.65 cw(c4621.83,3769.05) 4617.93,3783.61 ; R12.1@4607.48,3773.65 cw(c4621.83,3769.05) 4617.93,3783.61 ; R12.1@4607.48,3773.65 cw(c4621.83,3769.05) 4617.93,3783.61 ; R12.1@4607.48,3773.65 cw(c4621.83,3769.05) 4617.93,3783.61 ; R12.1@4607.48,3773.65 cw(c4621.83,3769.05) 4617.93,3783.61 ; R12.1@4607.48,3773.65 cw(c4621.83,3769.05) 4617.93,3783.61 ; R12.1@4607.48,3773.65 cw(c4621.83,3769.05) 4617.93,3783.61 ; R12.1@4607.48,3773.65 cw(c4621.83,3769.05) 4617.93,3783.61 ; R12.1@4607.48,3773.65 cw(c4621.83,3769.05) 4617.93,3783.61 ; R12.1@4607.48,3773.65 cw(c4621.83,3769.05) 4617.93,3783.61 ; R12.1@4607.48,3773.65 cw(c4621.83,3769.05) 4617.93,3783.61 ; R12.1@4607.48,3773.65 cw(c4621.83,3769.05) 4617.93,3783.61 ; R12.1@4607.48,3773.65 cw(c4621.83,3769.05) 4617.93,3783.61 ; R12.1@4607.48,3773.65 cw(c4621.83,3769.05) 4617.93,3783.61 ; R12.1@4607.48,3773.65 cw(c4621.83,3769.05) 4617.93,3783.61 ; R12.1@4607.48,3773.65 cw(c4621.83,3769.05) 4617.93,3783.61 ; R12.1@4607.48,3773.65 cw(c4621.83,3769.05) 4617.93,3783.61 ; R12.1@4607.48,3773.65 cw(c4621.83,3769.05) 4617.93,3783.61 ; R12.1@4607.48,3773.65 cw(c4621.83,3769.05) 4617.93,3783.61 ; R12.1@4607.48,3773.65 cw(c4621.83,3769.05) 4617.93,3783.61 ; R12.1@4607.48,3773.65 cw(c4621.83,3769.05) 4617.93,3783.61 ; R12.1@4607.48,3773.65 cw(c4621.83,3769.05) 4617.93,3783.61 ; R12.1@4607.48,3773.65 cw(c4621.83,3769.05) 4617.93,3783.61 ; R12.1@4607.48,3773.65 cw(c4621.83,3769.05) 4617.93,3783.61 ; R12.1@4607.48,3773.65 cw(c4621.83,3769.05) 4617.93,3783.61 ; R12.1@4607.48,3773.65 cw(c4621.83,3769.05) 4617.93,3783.61 ; R12.1@4612,3777 4650,3815 ; 4650,3815 cw(c4650,3759.59) Y1.1@4692.17,3795.54 ; 4650,3815 ccw(c4650,3870.41) Y1.1@4692.17,3834.46 ; 4650,3815 ccw(c4650,3870.41) Y1.1@4692.17,3834.46 ; 4650,3815 cw(c4650,3759.59) Y1.1@4692.17,3795.54 ; 4650,3815 ccw(c4650,3870.41) Y1.1@4692.17,3834.46 ; 4650,3815 cw(c4650,3759.59) Y1.1@4692.17,3795.54 ; 4650,3815 ccw(c4650,3870.41) Y1.1@4692.17,3834.46 ; 4650,3815 cw(c4650,3759.59) Y1.1@4692.17,3795.54 ; 4650,3815 ccw(c4650,3870.41) Y1.1@4692.17,3834.46 ; 4650,3815 cw(c4650,3759.59) Y1.1@4692.17,3795.54 ; 4650,3815 ccw(c4650,3870.41) Y1.1@4692.17,3834.46 ; 4650,3815 cw(c4650,3759.59) Y1.1@4692.17,3795.54 ; 4650,3815 ccw(c4650,3870.41) Y1.1@4692.17,3834.46 ; 4650,3815 cw(c4650,3759.59) Y1.1@4692.17,3795.54 ; 4650,3815 ccw(c4650,3870.41) Y1.1@4692.17,3834.46 ; 4650,3815 cw(c4650,3759.59) Y1.1@4692.17,3795.54 ; 4671.67,3815 cw(c4671.67,3778.06) Y1.1@4699.78,3802.02 ; 4671.67,3815 ccw(c4671.67,3851.94) Y1.1@4699.78,3827.98 ; 4671.67,3815 ccw(c4671.67,3851.94) Y1.1@4699.78,3827.98 ; 4671.67,3815 cw(c4671.67,3778.06) Y1.1@4699.78,3802.02 ; 4671.67,3815 ccw(c4671.67,3851.94) Y1.1@4699.78,3827.98 ; 4671.67,3815 cw(c4671.67,3778.06) Y1.1@4699.78,3802.02 ; 4671.67,3815 ccw(c4671.67,3851.94) Y1.1@4699.78,3827.98 ; 4671.67,3815 cw(c4671.67,3778.06) Y1.1@4699.78,3802.02 ; 4671.67,3815 ccw(c4671.67,3851.94) Y1.1@4699.78,3827.98 ; 4671.67,3815 cw(c4671.67,3778.06) Y1.1@4699.78,3802.02 ; 4671.67,3815 ccw(c4671.67,3851.94) Y1.1@4699.78,3827.98 ; 4671.67,3815 cw(c4671.67,3778.06) Y1.1@4699.78,3802.02 ; 4671.67,3815 ccw(c4671.67,3851.94) Y1.1@4699.78,3827.98 ; 4671.67,3815 cw(c4671.67,3778.06) Y1.1@4699.78,3802.02 ; 4671.67,3815 ccw(c4671.67,3851.94) Y1.1@4699.78,3827.98 ; 4671.67,3815 cw(c4671.67,3778.06) Y1.1@4699.78,3802.02 ; Y1.1@4749.14,3800.86 cw(c4783.28,3766.72) 4783.28,3815 ; Y1.1@4749.14,3800.86 cw(c4783.28,3766.72) 4783.28,3815 ; Y1.1@4749.14,3800.86 cw(c4783.28,3766.72) 4783.28,3815 ; Y1.1@4749.14,3800.86 cw(c4783.28,3766.72) 4783.28,3815 ; Y1.1@4749.14,3800.86 cw(c4783.28,3766.72) 4783.28,3815 ; Y1.1@4749.14,3800.86 cw(c4783.28,3766.72) 4783.28,3815 ; Y1.1@4749.14,3800.86 cw(c4783.28,3766.72) 4783.28,3815 ; Y1.1@4749.14,3800.86 cw(c4783.28,3766.72) 4783.28,3815 ; Y1.1@4749.14,3829.14 ccw(c4783.28,3863.28) 4783.28,3815 ; Y1.1@4749.14,3829.14 ccw(c4783.28,3863.28) 4783.28,3815 ; Y1.1@4749.14,3829.14 ccw(c4783.28,3863.28) 4783.28,3815 ; Y1.1@4749.14,3829.14 ccw(c4783.28,3863.28) 4783.28,3815 ; Y1.1@4749.14,3829.14 ccw(c4783.28,3863.28) 4783.28,3815 ; Y1.1@4749.14,3829.14 ccw(c4783.28,3863.28) 4783.28,3815 ; Y1.1@4749.14,3829.14 ccw(c4783.28,3863.28) 4783.28,3815 ; Y1.1@4749.14,3829.14 ccw(c4783.28,3863.28) 4783.28,3815 ; Y1.1@4756.21,3793.79 cw(c4807.43,3742.57) 4807.43,3815 ; Y1.1@4756.21,3793.79 cw(c4807.43,3742.57) 4807.43,3815 ; Y1.1@4756.21,3793.79 cw(c4807.43,3742.57) 4807.43,3815 ; Y1.1@4756.21,3793.79 cw(c4807.43,3742.57) 4807.43,3815 ; Y1.1@4756.21,3793.79 cw(c4807.43,3742.57) 4807.43,3815 ; Y1.1@4756.21,3793.79 cw(c4807.43,3742.57) 4807.43,3815 ; Y1.1@4756.21,3793.79 cw(c4807.43,3742.57) 4807.43,3815 ; Y1.1@4756.21,3793.79 cw(c4807.43,3742.57) 4807.43,3815 ; Y1.1@4756.21,3836.21 ccw(c4807.43,3887.43) 4807.43,3815 ; Y1.1@4756.21,3836.21 ccw(c4807.43,3887.43) 4807.43,3815 ; Y1.1@4756.21,3836.21 ccw(c4807.43,3887.43) 4807.43,3815 ; Y1.1@4756.21,3836.21 ccw(c4807.43,3887.43) 4807.43,3815 ; Y1.1@4756.21,3836.21 ccw(c4807.43,3887.43) 4807.43,3815 ; Y1.1@4756.21,3836.21 ccw(c4807.43,3887.43) 4807.43,3815 ; Y1.1@4756.21,3836.21 ccw(c4807.43,3887.43) 4807.43,3815 ; Y1.1@4756.21,3836.21 ccw(c4807.43,3887.43) 4807.43,3815 ; 4870.79,3815 cw(c4870.79,3774.79) C14.2@4899.22,3803.22 ; 4870.79,3815 cw(c4870.79,3774.79) C14.2@4899.22,3803.22 ; 4870.79,3815 cw(c4870.79,3774.79) C14.2@4899.22,3803.22 ; 4870.79,3815 cw(c4870.79,3774.79) C14.2@4899.22,3803.22 ; 4870.79,3815 cw(c4870.79,3774.79) C14.2@4899.22,3803.22 ; 4870.79,3815 cw(c4870.79,3774.79) C14.2@4899.22,3803.22 ; 4870.79,3815 cw(c4870.79,3774.79) C14.2@4899.22,3803.22 ; 4870.79,3815 cw(c4870.79,3774.79) C14.2@4899.22,3803.22 ; 4890.1,3815 ccw(c4890.1,3827.9) C14.2@4899.22,3818.78 ; 4890.1,3815 ccw(c4890.1,3827.9) C14.2@4899.22,3818.78 ; 4890.1,3815 ccw(c4890.1,3827.9) C14.2@4899.22,3818.78 ; 4890.1,3815 ccw(c4890.1,3827.9) C14.2@4899.22,3818.78 ; 4890.1,3815 ccw(c4890.1,3827.9) C14.2@4899.22,3818.78 ; 4890.1,3815 ccw(c4890.1,3827.9) C14.2@4899.22,3818.78 ; 4890.1,3815 ccw(c4890.1,3827.9) C14.2@4899.22,3818.78 ; 4890.1,3815 ccw(c4890.1,3827.9) C14.2@4899.22,3818.78
PA0: STM32F103ZET6.34